# Altium PCB PCB1.PcbDoc
Units mil, origin at the board's own origin, x right, y up, seen from the top; angles counter-clockwise.
Board outline 6000 x 4000 mil, 2 copper layers (Top Layer, Bottom Layer); 24 components, 0 nets, 70 pads, 4 vias.
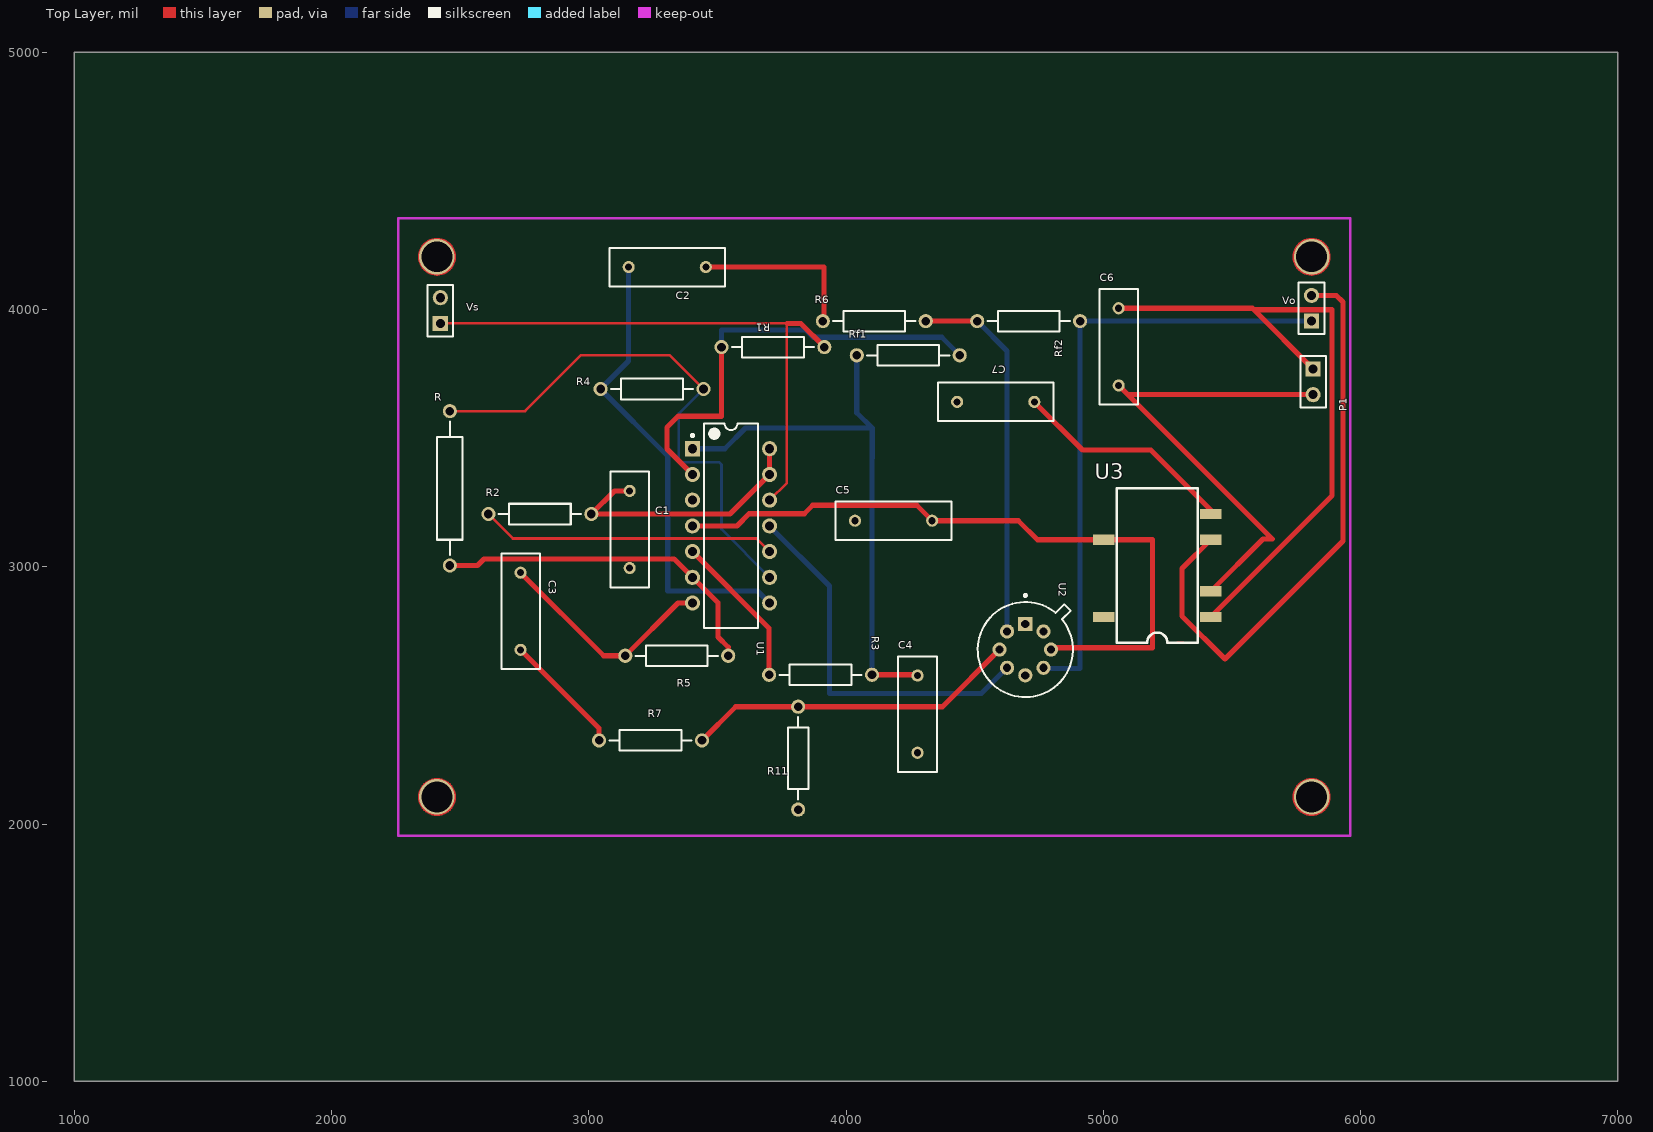
[diagram p0: Top Layer view]
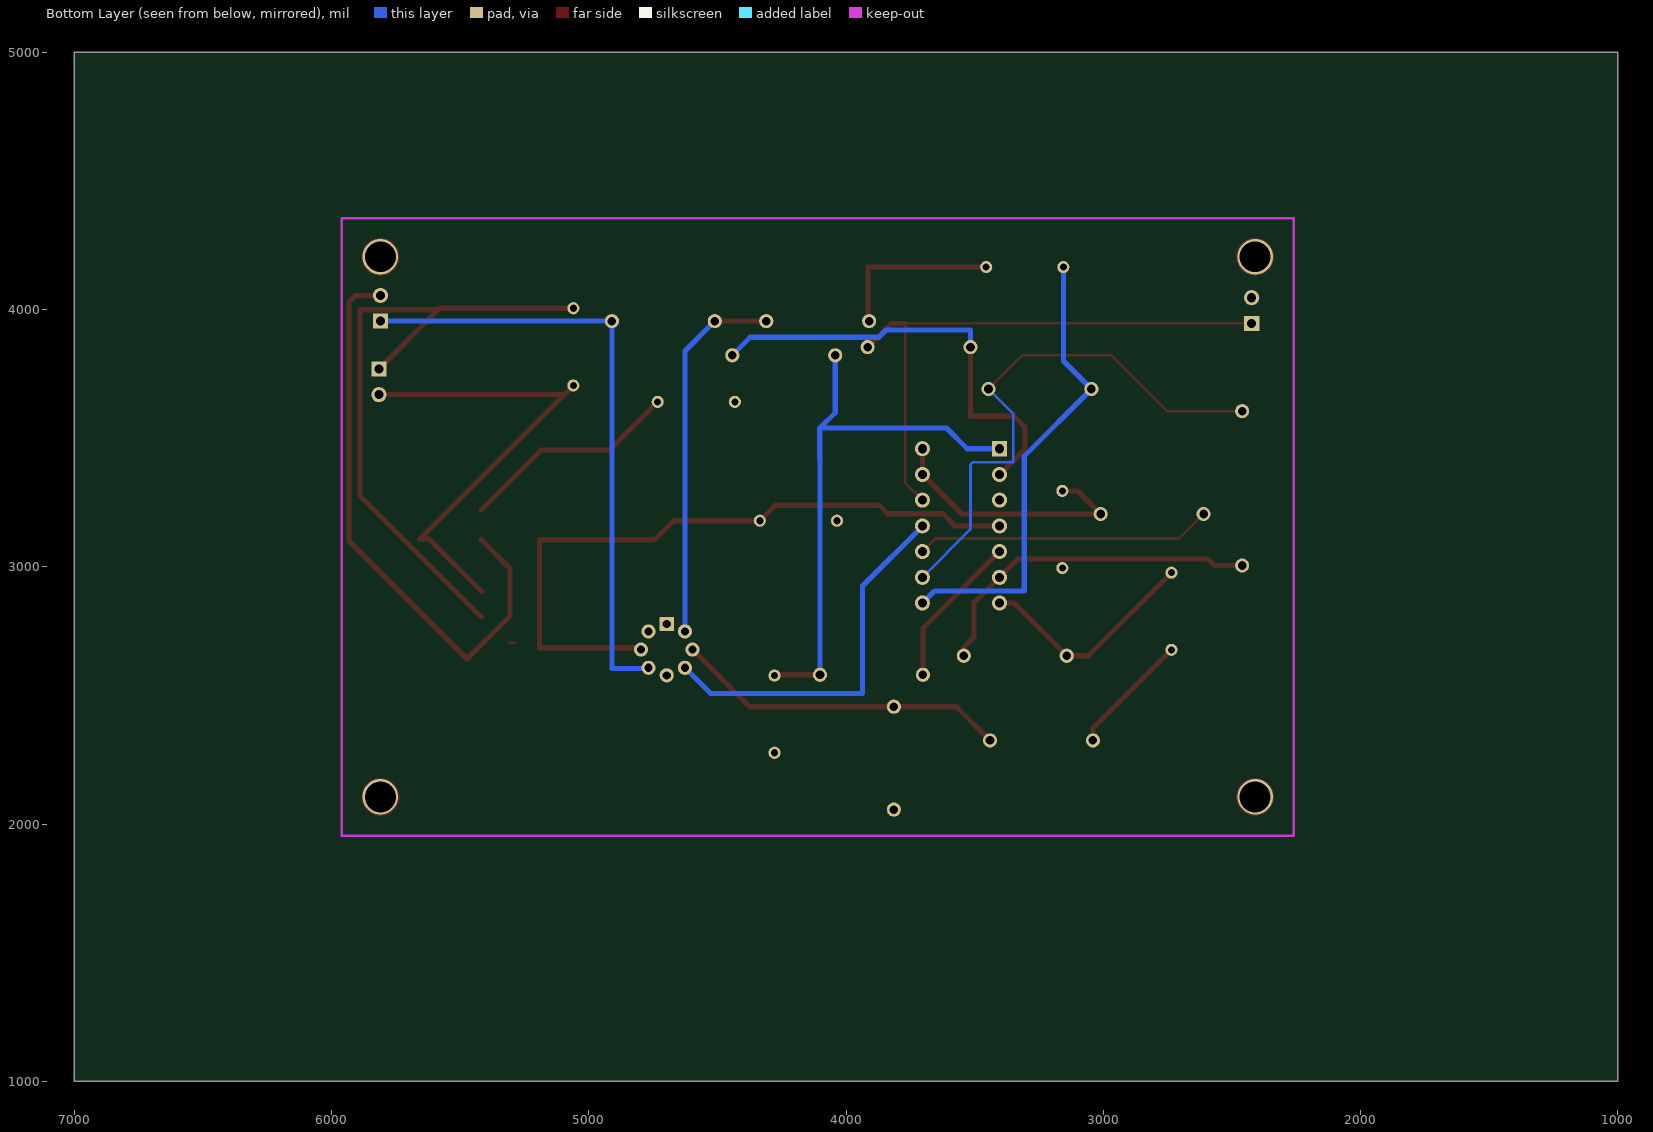
[diagram p1: Bottom Layer view, seen from below]

## Layer stack, top to bottom
Top Layer: signal copper 1.4
Dielectric: dielectric 12.6, FR-4, Dk 4.8
Bottom Layer: signal copper 1.4

## Board outline
1000,1000 7000,1000 7000,5000 1000,5000

## Design rules (kind name [scope] priority, off if disabled: settings)
Clearance [All] p1: gap=10
PolygonConnect [All] p1: connectstyle=Relief reliefconductorwidth=10 reliefentries=4 polygonreliefangle="90 Angle"
RoutingVias [All] p1: holewidth=28 width=50 viastyle="Through Hole" minholewidth=28 minwidth=50 maxholewidth=28 maxwidth=50
SilkscreenOverComponentPads [All] p1: minsilkscreentomaskgap=10
SolderMaskExpansion [All] p1: expansion=4
Width [All] p1: maxlimit=10 minlimit=10 preferedwidth=10
27 further rules are at their usual default settings.

## Components (designator, comment, footprint, x,y, rotation, side; value= is the part's Value field where it differs from the comment)
C1 "Cap" RAD-0.3 3159,3145 r90 top
C2 "Cap" RAD-0.3 3305,4165 r0 top
C3 "Cap" RAD-0.3 2735,2827 r270 top
C4 "Cap" RAD-0.3 4278,2427 r90 top
C5 "Cap" RAD-0.3 4185,3179 r0 top
C6 "Cap" RAD-0.3 5060,3855 r270 top
C7 "Cap" RAD-0.3 4582,3641 r180 top
P1 "Header 2" HDR1X2 5816,3769 r270 top
R "Res Adj2" AXIAL-0.6 2460,3305 r90 top
R1 "Res2" AXIAL-0.4 3716,3854 r180 top
R2 "Res2" AXIAL-0.4 2810,3205 r180 top
R3 "Res2" AXIAL-0.4 3901,2580 r180 top
R4 "Res2" AXIAL-0.4 3246,3691 r180 top
R5 "Res2" AXIAL-0.4 3342,2654 r180 top
R6 "Res2" AXIAL-0.4 4110,3955 r0 top
R7 "Res2" AXIAL-0.4 3240,2325 r0 top
R11 "Res2" AXIAL-0.4 3814,2256 r90 top
Rf1 "Res2" AXIAL-0.4 4242,3822 r180 top
Rf2 "Res2" AXIAL-0.4 4710,3955 r180 top
U1 "LM124J" J14A 3553,3159 r0 top
U2 "LM741H" H08C 4697,2678 r270 top
U3 "Component_1" PCBComponent_1 29710,33505 r90 top
Vo "Header 2" HDR1X2 5810,3955 r90 top
Vs "CON1" HDR1X2 2423,3946 r90 top

## Footprints (in the part's own frame and the unit in brackets; to place one, negate y for a bottom-side part, rotate by r counter-clockwise, add the part's x,y. Pads: shape width x height; smd on the part's side, far side on the other; paste and mask are expansions set on the pad)
AXIAL-0.4 [mm] "Axial Device, Thru-Hole; 2 Leads; 0.4 in Pin Spacing"
  round 1.4 hole 0.85: 1(-5.08,0) 2(5.08,0)
  silkscreen extent -4.06,-1.02 4.06,1.02
AXIAL-0.6 [mm] "Axial Device, Thru-Hole; 2 Leads; 0.6 in Pin Spacing"
  round 1.4 hole 0.85: 1(-7.62,0) 2(7.62,0)
  silkscreen extent -6.6,-1.27 6.6,1.27
H08C [mm] "Can; 8 Leads; Pin Circle Dia. 5.08 mm; Lead Dia. 0.48 mm (max)"
  rect 1.4x1.4 hole 0.8: 1(-2.54,0)
  round 1.4 hole 0.8: 2(-1.796,-1.796) 3(0,-2.54) 4(1.796,-1.796) 5(2.54,0) 6(1.796,1.796) 7(0,2.54) 8(-1.796,1.796)
  silkscreen extent -5.47,-4.7 4.7,4.7, body extent -4.71,-4.71 4.71,4.71, height 5.56
HDR1X2 [mm] "Connector; Header; 2 Position"
  rect 1.5x1.5 hole 0.9: 1(0,0)
  round 1.5 hole 0.9: 2(2.54,0)
  silkscreen extent -1.27,-1.27 3.81,1.27
J14A [mm] "DIP, 14-Leads, Row Spacing 7.62mm, Pitch 2.54mm, Body 19.56x6.73mm"
  rect 1.5x1.5 hole 0.9: 1(-3.81,7.62)
  round 1.5 hole 0.9: 2(-3.81,5.08) 3(-3.81,2.54) 4(-3.81,0) 5(-3.81,-2.54) 6(-3.81,-5.08) 7(-3.81,-7.62) 8(3.81,-7.62) 9(3.81,-5.08) 10(3.81,-2.54) 11(3.81,0) 12(3.81,2.54) 13(3.81,5.08) 14(3.81,7.62)
  silkscreen extent -3.93,-10.1 2.65,10.1, body extent -3.6,-10.1 3.6,10.1, height 5.08
PCBComponent_1 [mm]
  rect 1x2.1 smd: 1(-779.78,617.017) 2(-777.24,617.017) 4(-772.16,617.017) 5(-769.62,617.017) 7(-772.16,627.583) 10(-779.78,627.583)
  Top Layer lines w0.254: -782.32,620.3 -782.32,619.76
  silkscreen extent -782.32,618.3 -767.08,626.3
RAD-0.3 [mm] "Radial Cap, Thru-Hole; 2 Leads; 0.3 in Pin Spacing"
  round 1.2 hole 0.7: 1(-3.81,0) 2(3.81,0)
  silkscreen extent -5.71,-1.91 5.71,1.91

## Part data
C1 C2 C3 C4 C5 C6 C7: "Capacitor"
P1 Vo: "Header, 2-Pin"
R: "Variable Resistor"
R1 R2 R3 R4 R5 R6 R7 R11 Rf1 Rf2: "Resistor"
U1: "Low Power Quad Operational Amplifier, 14-pin CerDIP"
U2: "Operational Amplifier, 8-pin TO-99"
Vs: library part "Header 2", "Header, 2-Pin"

## Via types
v1: diameter 138, hole 120, Top Layer to Bottom Layer, 4 vias

## Nets (pads, with @x,y where several pads share a name; then routed paths per layer and width w, separated by ;. In a path a pad name is that pad's centre, name@x,y a point inside that pad or via, vN(x,y) a via of type N, cw(c..) or ccw(c..) an arc to the next point about the centre after c; other vN are vias at no path point)
pads on no net: C1.1 C1.2 C2.1 C2.2 C3.1 C3.2 C4.1 C4.2 C5.1 C5.2 C6.1 C6.2 C7.1 C7.2 P1.1 P1.2 R1.1 R1.2 R2.1 R2.2 R3.1 R3.2 R4.1 R4.2 R5.1 R5.2 R6.1 R6.2 R7.1 R7.2 R11.1 R11.2 R.1 R.2 Rf1.1 Rf1.2 Rf2.1 Rf2.2 U1.1 U1.2 U1.3 U1.4 U1.5 U1.6 U1.7 U1.8 U1.9 U1.10 U1.11 U1.12 U1.13 U1.14 U2.1 U2.2 U2.3 U2.4 U2.5 U2.6 U2.7 U2.8 U3.1 U3.2 U3.4 U3.5 U3.7 U3.10 Vo.1 Vo.2 Vs.1 Vs.2
copper on no net: | length 34951.1
  Top Layer w10: 2423,3946 3770,3946 3770,3326 3703,3259 ; 2460,3605 2752,3605 2970,3823 3314,3823 3446,3691 ; 2610,3205 2705,3110 3652,3110 3703,3059 ; 2479,2105 ccw(c2410,2105) 2479,2105 ; 2479,4205 ccw(c2410,4205) 2479,4205 ; 5879,2105 ccw(c5810,2105) 5879,2105 ; 5879,4205 ccw(c5810,4205) 5879,4205
  Top Layer w20: 2460,3005 2568,3005 2593,3030 3332,3030 3403,2959 3502,2860 3502,2727 3542,2687 ; 2735,2677 3040,2372 3040,2325 ; 2735,2977 3058,2654 3142,2654 3347,2859 3403,2859 ; 3159,3295 3100,3295 3010,3205 3549,3205 3703,3359 3703,3459 ; 3403,3059 3701,2761 3701,2580 ; 3403,3159 3576,3159 3623,3206 3838,3206 3871,3239 4275,3239 4335,3179 4670,3179 4744,3105 5002,3105 5191,3105 5191,2685 4804,2685 4797,2678 4797,2681 ; 3403,3359 3304,3458 3304,3542 3347,3585 3516,3585 3516,3854 ; 3440,2325 3571,2456 3814,2456 4375,2456 4597,2678 ; 3455,4165 3914,4165 3914,3959 ; 3770,3946 3824,3946 3916,3854 ; 4101,2580 4275,2580 4278,2577 ; 4310,3955 4510,3955 ; 4732,3641 4919,3454 5185,3454 5418,3221 ; 4767.71,2607.29 4779,2596 ; 5060,3705 5096,3669 ; 5060,4005 5580,4005 5586,3999 ; 5418,2805 5890,3277 5890,3999 5586,3999 ; 5418,2905 5621,3108 5657,3108 5096,3669 ; 5418,3105 5306,2993 5306,2808 5473,2641 5932,3100 5932,4029 5906,4055 5810,4055 ; 5816,3669 5096,3669 ; 5816,3769 5586,3999
  Bottom Layer w10: 3446,3691 3352,3597 3350,3597 3350,3407 3506,3407 3516,3397 3516,3146 3703,2959
  Bottom Layer w20: 3155,4165 3155,3800 3046,3691 3307,3430 3307,2906 3656,2906 3703,2859 ; 3403,3459 3529,3459 3609,3539 4102,3539 ; 3516,3854 3516,3920 3844,3920 3872,3892 4372,3892 4442,3822 ; 3703,3159 3702,3159 3936,2925 3936,2508 4527,2508 4626.29,2607.29 ; 4042,3822 4042,3599 4102,3539 ; 4101,2580 4101,3422 ; 4102,3423 4102,3539 ; 4510,3955 4626.29,3838.71 4626.29,2748.71 ; 4767.71,2607.29 4770,2605 4910,2605 4910,3955 5810,3955
  other v1: 2410,2105 5810,2105 2410,4205 5810,4205

## Keep-outs
Keep-Out Layer:
  lines w10: 2260,1955 2260,4355 5960,4355 5960,1955 2260,1955